# Altium PCB version2.PcbDoc
Units mm, origin at the board's own origin, x right, y up, seen from the top; angles counter-clockwise.
Board outline 80 x 30 mm, 4 copper layers (Top Layer, GNDPlane1, GNDPlane2, Bottom Layer), stack 1.587 mm thick; 38 components, 28 nets, 175 pads, 296 vias.
Unrouted connection lines stored in the file: 2.
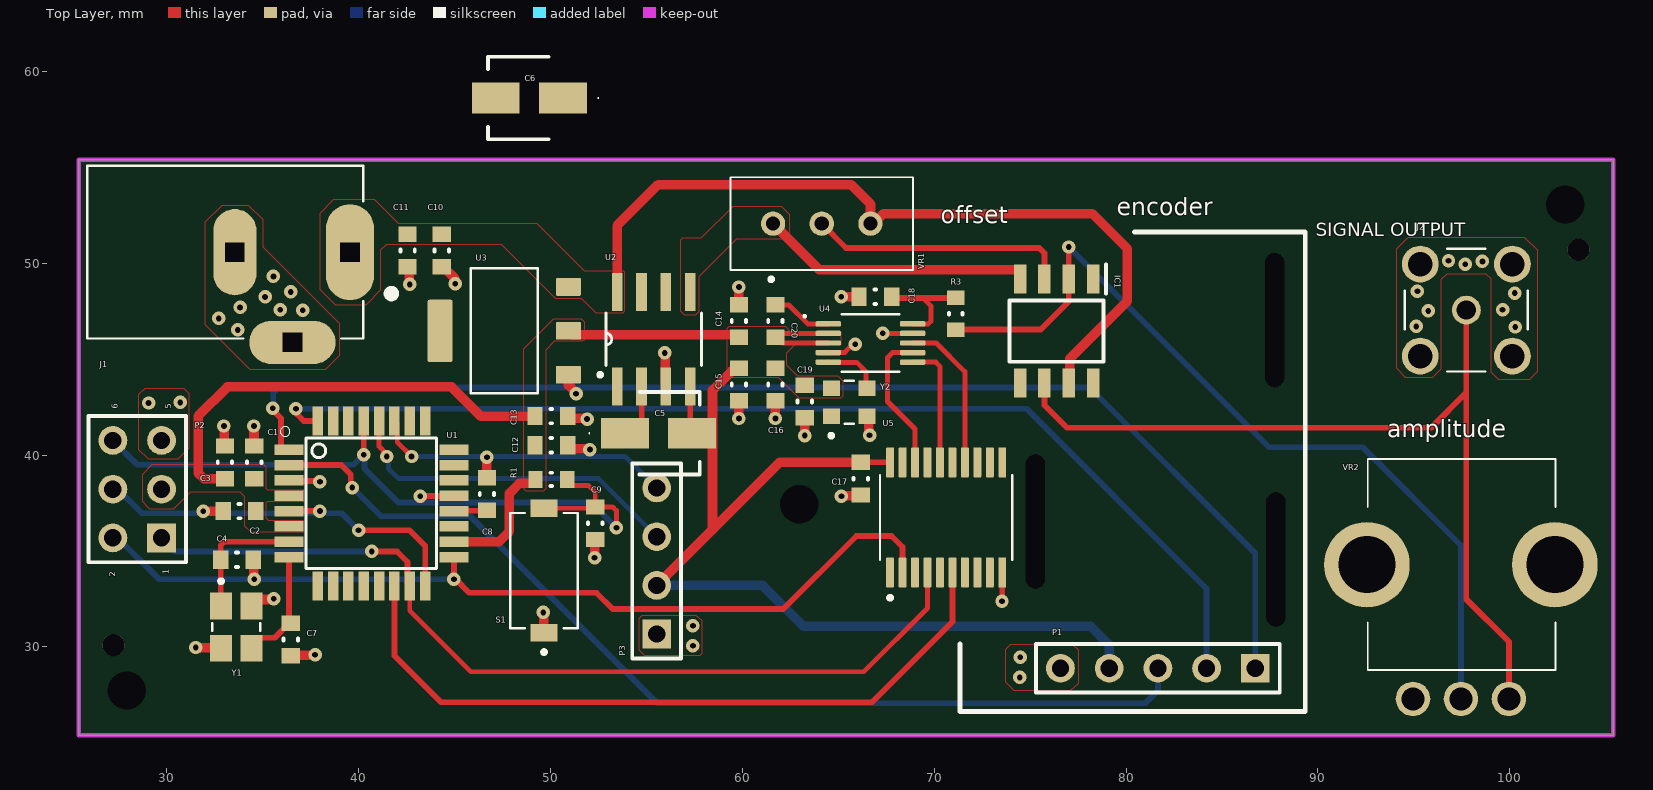
[diagram p0: Top Layer view]
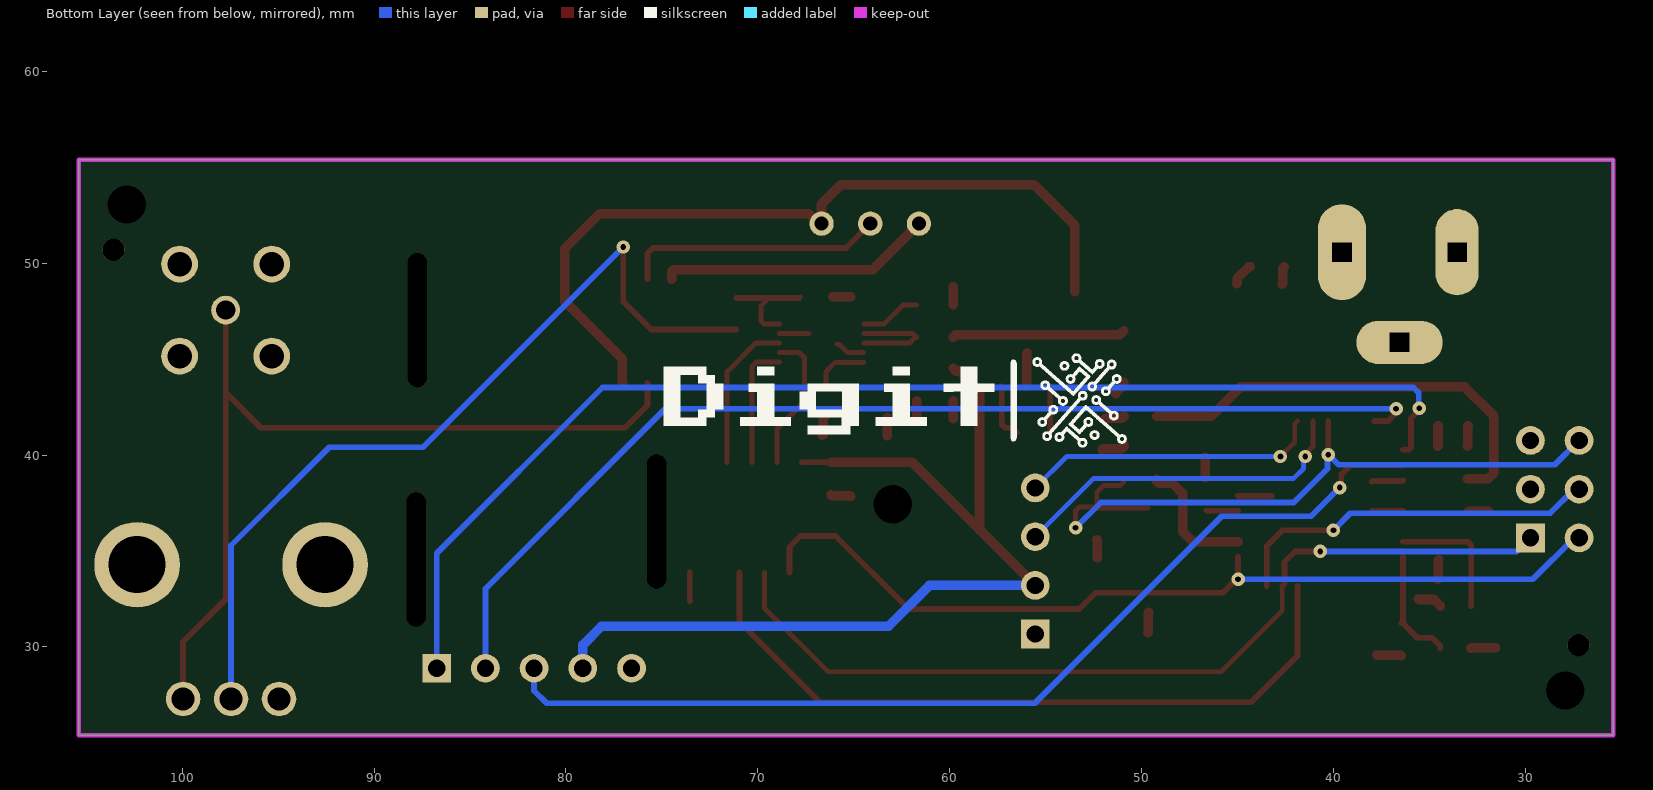
[diagram p1: Bottom Layer view, seen from below]
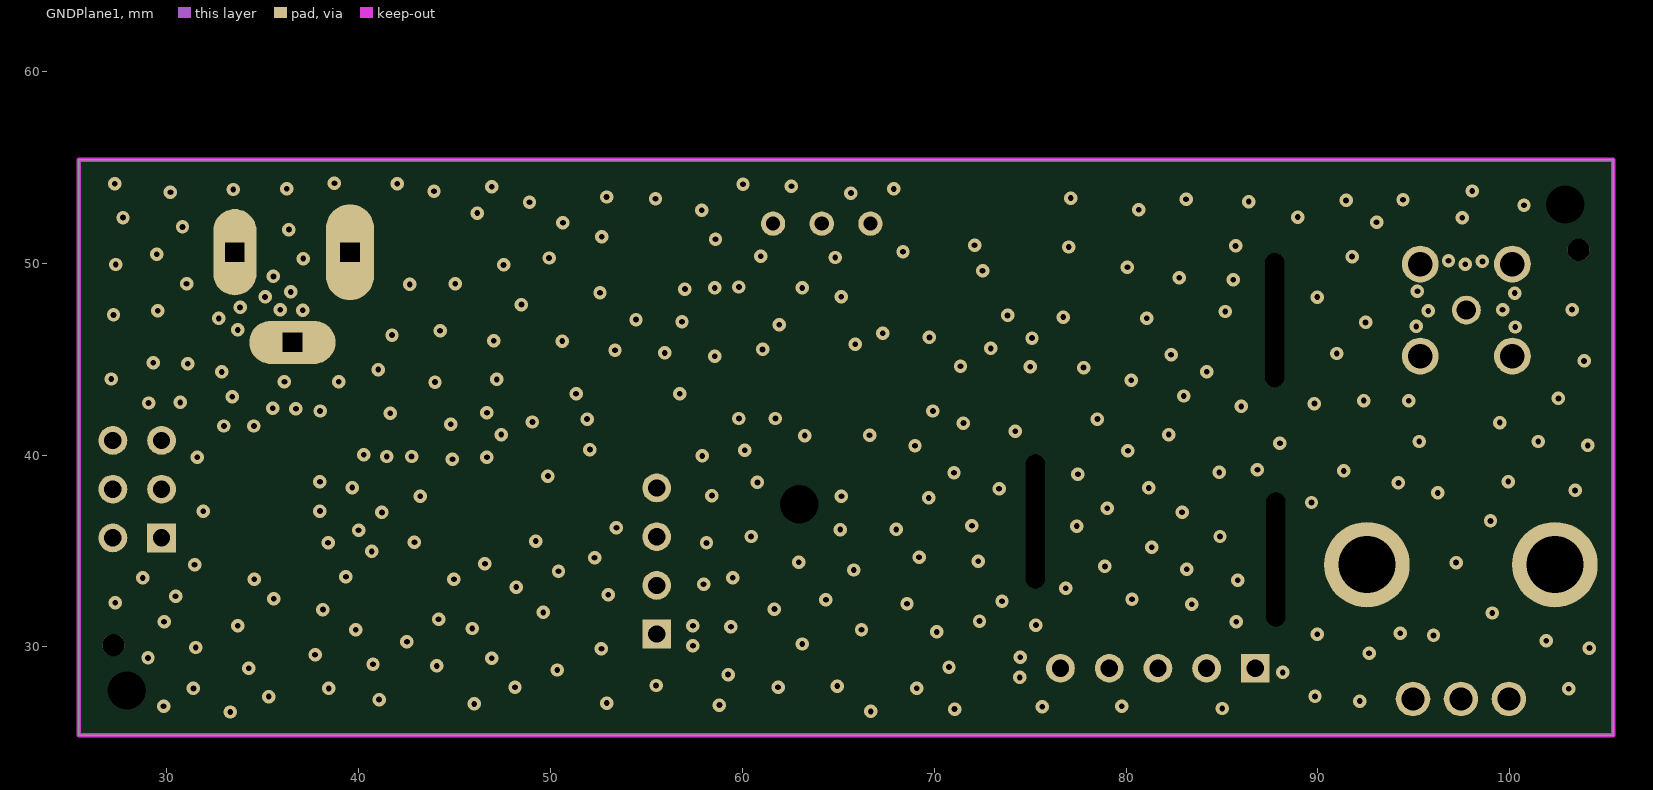
[diagram p2: GNDPlane1]
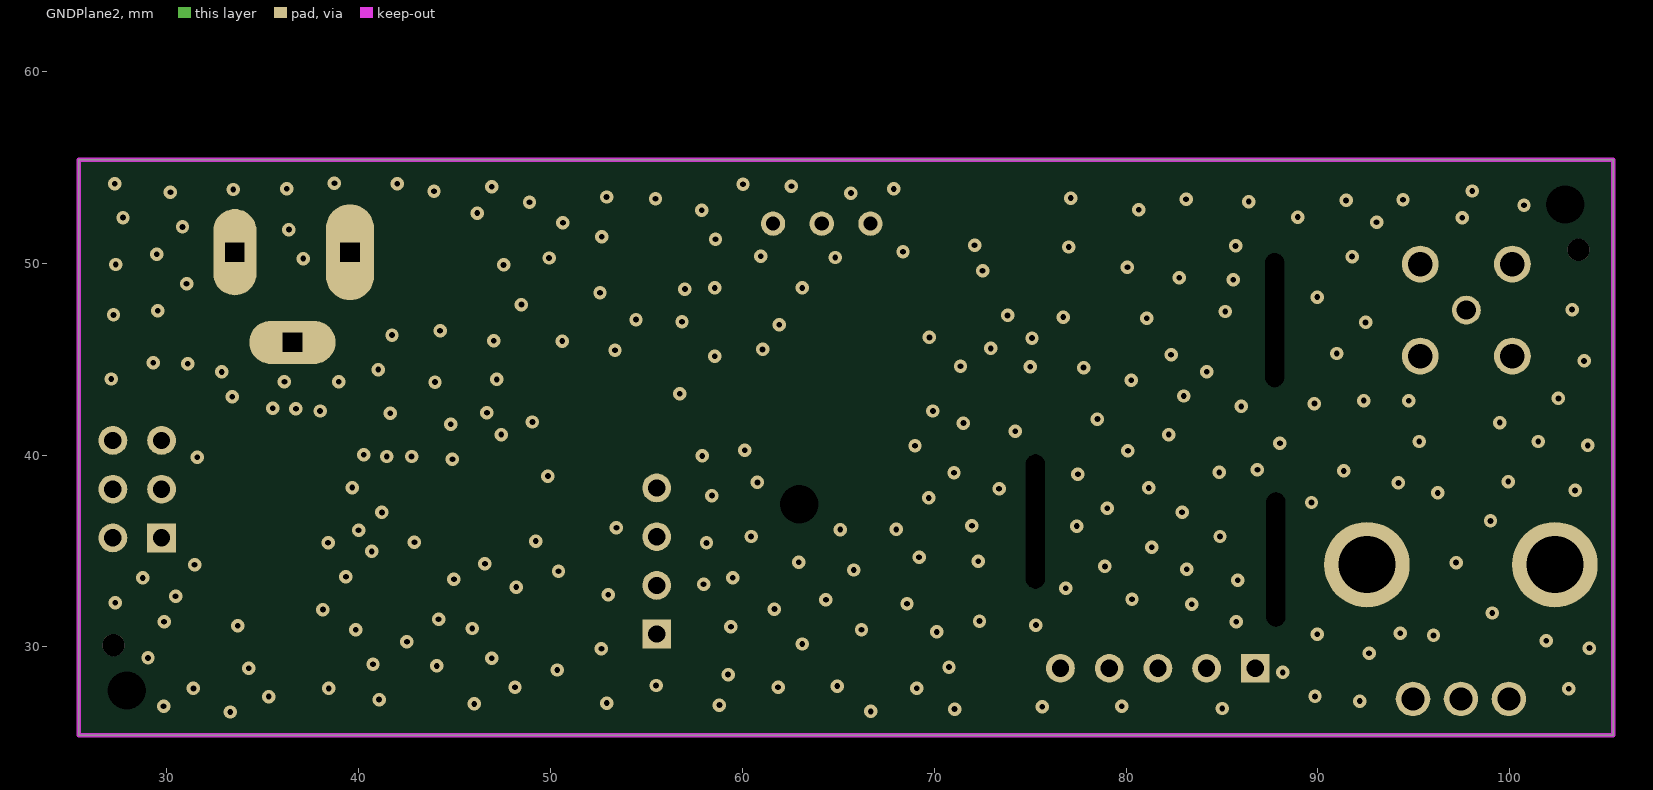
[diagram p3: GNDPlane2]
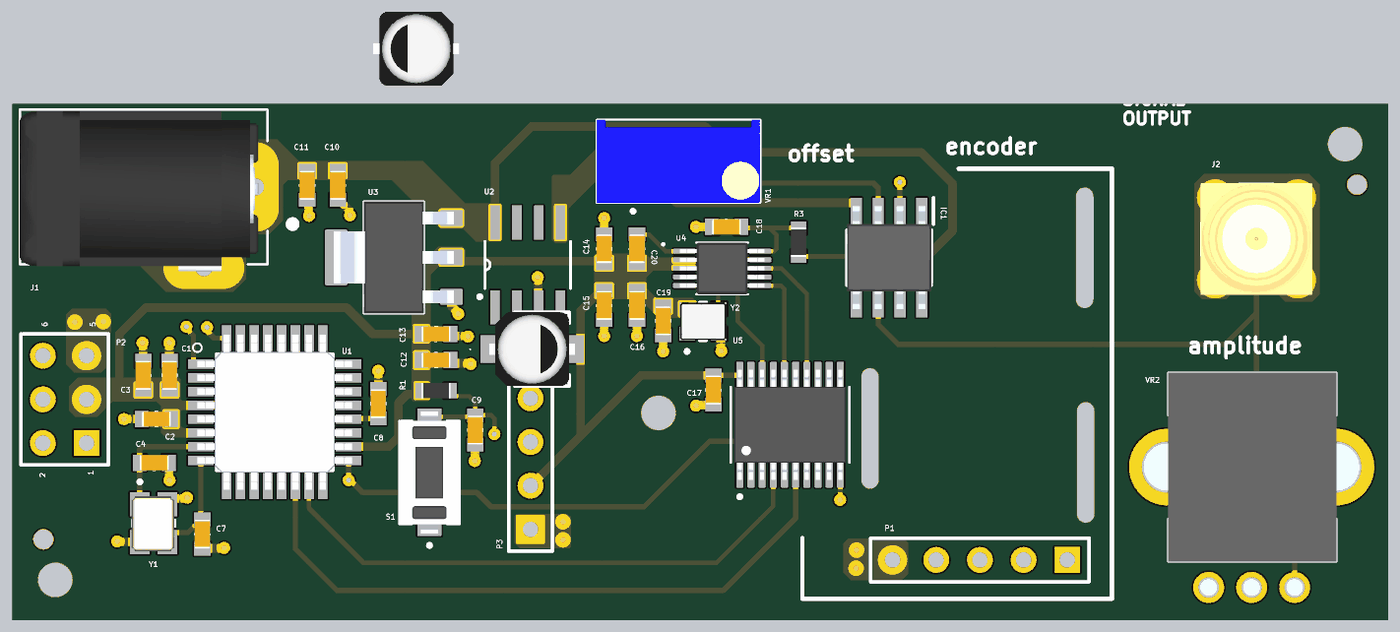
[diagram p4: 3D render of the assembled board from above, using the file's embedded part models]

## Layer stack, top to bottom
Top Solder: solder mask 0.0102, Solder Resist, Dk 4
Top Layer: signal copper 0.0356
Dielectric 2: prepreg 0.2104, PP-006, Dk 4.6
GNDPlane1: signal copper 0.0152
Dielectric 1: core 1.065, FR-4, Dk 4.6
GNDPlane2: signal copper 0.0152
Dielectric 3: prepreg 0.2104, PP-006, Dk 4.6
Bottom Layer: signal copper 0.0356
Bottom Solder: solder mask 0.0102, Solder Resist, Dk 4

## Board outline
25.4,25.4 105.4,25.4 105.4,55.4 25.4,55.4

## Design rules (kind name [scope] priority, off if disabled: settings)
Clearance [All] p1: gap=0.254 ignorepadtopadclearanceinfootprint=FALSE except(0: Arc-Hole Track-Hole SMDPad-Hole THPad-Hole Via-Hole Fill-Hole Poly-Hole Region-Hole Text-Hole; 0.127: Arc-Arc Arc-Track Arc-SMDPad Track-Track Track-SMDPad SMDPad-SMDPad)
PolygonConnect PolygonConnect_GND [(InNamedPolygon('GND_PowerPlane1') AND InNamedPolygon('GND_PowerPlane2'))] p1: connectstyle=Relief reliefconductorwidth=0.254 reliefentries=4 polygonreliefangle="90 Angle" airgapwidth=0.254
PolygonConnect [All] p2: connectstyle=Direct reliefconductorwidth=0.254 reliefentries=4 polygonreliefangle="90 Angle" airgapwidth=0.254
RoutingVias [All] p1: holewidth=0.711 width=1.27 viastyle="Through Hole" minholewidth=0.711 minwidth=1.27 maxholewidth=0.711 maxwidth=1.27
SolderMaskExpansion [All] p1: expansion=0.102 istentingtop=FALSE
Width [All] p1: maxlimit=0.5 minlimit=0.254 preferedwidth=0.3
30 further rules are at their usual default settings.

## Components (designator, comment, footprint, x,y, rotation, side; value= is the part's Value field where it differs from the comment)
C1 "100nF" CAP_0603 34.544,39.624 r270 top
C2 "100nF" CAP_0603 33.782,37.084 r0 top
C3 "10uF" CAP_0603 33.02,39.624 r270 top
C4 "50pF" CAP_0603 33.655,34.544 r180 top
C5 "10uF" EEE1AA220WR 55.626,41.148 r0 top
C6 "10uF" EEE1AA220WR 48.89,58.62 r180 top
C7 "50pF" CAP_0603 36.449,30.392 r90 top
C8 "100nF" CAP_0603 46.68,37.98 r270 top
C9 "100nF" CAP_0603 52.324,36.449 r90 top
C10 "10uF" CAP_0603 44.323,50.673 r90 top
C11 "100nF" CAP_0603 42.545,50.673 r90 top
C12 "10uF" CAP_0603 50.038,40.513 r180 top
C13 "100nF" CAP_0603 50.038,42.037 r180 top
C14 "100nF" CAP_0603 59.817,46.99 r270 top
C15 "10uF" CAP_0603 59.817,43.688 r90 top
C16 "100nF" CAP_0603 61.722,43.688 r90 top
C17 "100nF" CAP_0603 66.167,38.774 r90 top
C18 "100nF" CAP_0603 66.929,48.26 r0 top
C19 "100nF" CAP_0603 63.246,42.799 r90 top
C20 "10nF" CAP_0603 61.722,46.99 r270 top
IC1 "TL071CDR" SOIC127P600X175-8N 76.38,46.47 r270 top
J1 "PJ_002AH" DCJack_3pins 39.54,50.58 r0 top
J2 "SMA_Connector" SMA_Connector 97.74,47.562 r0 top
P1 "Header 5" HDR1X5 86.74,28.89 r180 top
P2 "Header 3X2" HDR2X3 29.718,35.687 r90 top
P3 "Header 4" HDR1X4 55.53,30.67 r90 top
R1 "10k" RES_0603 50.038,38.735 r180 top
R3 "2.2k" RES_0603 71.12,47.371 r90 top
S1 "Switch_SPST" SPST-NO_Switch 49.657,30.734 r90 top
U1 "Atmega328-AU" ATMEGA328-AU 36.358,40.284 r0 top
U2 "ICL7660AIBAZA-T" ICL7660AIBAZA-T 53.467,43.586 r90 top
U3 "AMS1117-3.3" SOT229P700X180-4N 50.927,44.192 r180 top
U4 "AD9833BRMZ-REEL7" AD9833BRMZ-REEL7 66.675,45.847 r0 top
U5 "3-Wire Buffer Driver" SOP65P640X120-20N 67.698,33.884 r90 top
VR1 "3296W-1-103" 3296W1103 61.595,52.07 r90 top
VR2 "RK09K1130ACL" RK09K1130ACL 97.46,27.29 r0 top
Y1 "Crystal Oscillator" 4pinOscillator 32.817,32.131 r270 top
Y2 "S3D25.000000A20F30T" OSC_ECS-327TXO-30-TR 64.643,42.037 r0 top

## Footprints (in the part's own frame and the unit in brackets; to place one, negate y for a bottom-side part, rotate by r counter-clockwise, add the part's x,y. Pads: shape width x height; smd on the part's side, far side on the other; paste and mask are expansions set on the pad)
4pinOscillator [mm] "SMD3225-4P"
  rect 1.4x1.15 smd: 1(0,0) 2(2.2,0) 3(2.2,1.6) 4(0,1.6)
  silkscreen extent -1.4,-0.45 1.3,2.05, body extent -0.46,-0.49 2.74,2.01, height 0.6
3296W1103 [mm]
  round 1.269 hole 0.74: 1(0,0) 2(0,-2.54) 3(0,-5.08)
  silkscreen extent -3,-7.3 2.42,2.22, body extent -2.42,-7.29 2.42,2.21, height 11.44
AD9833BRMZ-REEL7 [mm] "10-MSOP"
  rrect50% 1.32x0.28 smd: 1(-2.2,1) 2(-2.2,0.5) 3(-2.2,0) 4(-2.2,-0.5) 5(-2.2,-1) 6(2.2,-1) 7(2.2,-0.5) 8(2.2,0) 9(2.2,0.5) 10(2.2,1)
  silkscreen extent -3.48,-1.5 1.5,1.5, body extent -2.45,-1.5 2.45,1.5, height 1.07
ATMEGA328-AU [mm] "TQFP-32(7x7)"
  rect 1.5x0.55 smd: 1(0,0) 2(0,-0.8) 3(0,-1.6) 4(0,-2.4) 5(0,-3.2) 6(0,-4) 7(0,-4.8) 8(0,-5.6) 17(8.6,-5.6) 18(8.6,-4.8) 19(8.6,-4) 20(8.6,-3.2) 21(8.6,-2.4) 22(8.6,-1.6) 23(8.6,-0.8) 24(8.6,0)
  rect 0.55x1.5 smd: 9(1.5,-7.1) 10(2.3,-7.1) 11(3.1,-7.1) 12(3.9,-7.1) 13(4.7,-7.1) 14(5.5,-7.1) 15(6.3,-7.1) 16(7.1,-7.1) 25(7.1,1.5) 26(6.3,1.5) 27(5.5,1.5) 28(4.7,1.5) 29(3.9,1.5) 30(3.1,1.5) 31(2.3,1.5) 32(1.5,1.5)
  silkscreen extent -0.45,-6.2 7.7,1.2, body extent -0.2,-7.3 8.8,1.7, height 1.18
CAP_0603 [mm] "Chip Capacitor, 2-Leads, Body 1,60x0,80mm, IPC Medium Density, 0603"
  rect 0.8x0.95 smd: 1(-0.85,0) 2(0.85,0)
  silkscreen extent -0.05,-0.38 0.05,0.38, body extent -0.85,-0.45 0.85,0.45, height 0.6
DCJack_3pins [mm]
  oval 2.5x5 hole 1 square: 1(0,0)
  oval 2.25x4.5 hole 1 square: 2(-6,0)
  oval 4.5x2.25 hole 1 square: 3(-3,-4.7)
  silkscreen extent -13.7,-4.5 2.36,4.5, body extent -13.72,-4.9 0.18,4.4, height 11
EEE1AA220WR [mm]
  rect 2.5x1.6 smd: 1(-1.75,0) 2(1.75,0)
  silkscreen extent -3.63,-2.15 2.15,2.15, body extent -2.5,-2.15 2.5,2.15, height 5.78
HDR1X4 [mm] "Connector; Header; 4 Position"
  rect 1.5x1.5 hole 0.9: 1(0,0)
  round 1.5 hole 0.9: 2(2.54,0) 3(5.08,0) 4(7.62,0)
  silkscreen extent -1.27,-1.27 8.89,1.27
HDR1X5 [mm] "Connector; Header; 5 Position"
  rect 1.5x1.5 hole 0.9: 1(0,0)
  round 1.5 hole 0.9: 2(2.54,0) 3(5.08,0) 4(7.62,0) 5(10.16,0)
  silkscreen extent -1.27,-1.27 11.43,1.27
HDR2X3 [mm] "Connector; Header; 3x2 Position"
  rect 1.5x1.5 hole 0.9: 1(0,0)
  round 1.5 hole 0.9: 2(0,2.54) 3(2.54,0) 4(2.54,2.54) 5(5.08,0) 6(5.08,2.54)
  silkscreen extent -1.27,-1.27 6.35,3.81
ICL7660AIBAZA-T [mil] "SOIC-8"
  rect 78x22 smd: 1(0,0) 2(0,-50) 3(0,-100) 4(0,-150) 5(194,-150) 6(194,-100) 7(194,-50) 8(194,0)
  silkscreen extent 43,-173 151,23
OSC_ECS-327TXO-30-TR [mm] "25MHz - 2.5*2.0mm -  SMD3225-4P"
  rect 0.9x0.8 smd: 1(0,0) 2(1.85,0) 3(1.85,1.45) 4(0,1.45)
  silkscreen extent -0.11,-1.12 1.15,1.85, body extent -0.43,-0.39 2.28,1.85, height 1.2
RES_0603 [mm] "Chip Resistor, 2-Leads, Body 1,60x0,80mm, IPC Medium Density, 0603"
  rect 0.75x0.9 smd: 1(-0.825,0) 2(0.825,0)
  silkscreen extent -0.05,-0.35 0.05,0.35, body extent -0.85,-0.45 0.85,0.45, height 0.6
RK09K1130ACL [mm]
  round 1.8 hole 1.2: 1(-2.5,0) 2(0,0) 3(2.5,0)
  round 4.46 hole 2.973: MH1(-4.9,7) MH2(4.9,7)
  silkscreen extent -4.86,1.5 4.94,12.5, body extent -6.28,-0.5 6.29,12.5, height 15.1
SMA_Connector [mm]
  round 1.508 hole 1: 1(0,0)
  round 1.92 hole 1.28: G1(-2.4,2.4) G2(-2.4,-2.4) G3(2.4,-2.4) G4(2.4,2.4)
  silkscreen extent -3.2,-3.2 3.2,3.2, body extent -3.25,-3.25 3.25,3.25, height 13.6
SOIC127P600X175-8N [mm]
  rect 1.525x0.65 smd: 1(-2.712,1.905) 2(-2.712,0.635) 3(-2.712,-0.635) 4(-2.712,-1.905) 5(2.712,-1.905) 6(2.712,-0.635) 7(2.712,0.635) 8(2.712,1.905)
  silkscreen extent -3.47,-2.45 1.6,2.58, body extent -3,-2.45 3,2.45, height 1.75
SOP65P640X120-20N [mm] "3-Wire buffer driver"
  rrect25% 1.57x0.41 smd: 1(0,0) 2(0,-0.65) 3(0,-1.3) 4(0,-1.95) 5(0,-2.6) 6(0,-3.25) 7(0,-3.9) 8(0,-4.55) 9(0,-5.2) 10(0,-5.85) 11(5.74,-5.85) 12(5.74,-5.2) 13(5.74,-4.55) 14(5.74,-3.9) 15(5.74,-3.25) 16(5.74,-2.6) 17(5.74,-1.95) 18(5.74,-1.3) 19(5.74,-0.65) 20(5.74,0)
  silkscreen extent -1.42,-6.38 5.07,0.53, body extent -0.33,-6.18 6.07,0.33, height 1.2
SOT229P700X180-4N [mm] "AMS1117-3.3"
  rrect15% 1.31x0.93 smd: 1(0,0) 2(0,-2.29) 3(0,-4.58)
  rrect15% 1.31x3.24 smd: 4(6.69,-2.29)
  silkscreen extent -1.76,-5.54 5.1,0.96, body extent -0.15,-5.54 6.84,0.96, height 1.8
SPST-NO_Switch [mm]
  rect 0.9x1.4 smd: 1(0,0) 2(6.5,0)
  silkscreen extent -1.1,-1.75 6.25,1.75, body extent -0.32,-1.75 6.78,1.75, height 4.3

## Part data
C1 C2 C3 C4 C7 C8 C9 C10 C11 C12 C13 C14 C15 C16 C17 C18 C19 C20: library part Cap_0603, "Capacitor SMD 0603 Generic"
C5 C6: library part EEE-1CA100SR, "Capacitor Polarised", Manufacturer_Name=Panasonic, Mouser Part Number=667-EEE-1CA100SR, Arrow Part Number=EEE-1CA100SR, Arrow Price/Stock=https://www.arrow.com/en/products/eee-1ca100sr/panasonic?region=europe, Datasheet Link=http://industrial.panasonic.com/cdbs/www-data/pdf/RDE0000/ABA0000C1145.pdf, Height=5.5mm, Manufacturer_Part_Number=EEE-1CA100SR, Mouser Price/Stock=https://www.mouser.co.uk/ProductDetail/Panasonic/EEE-1CA100SR?qs=ANJC8C65Mw5HUsKv8znGCA%3D%3D
IC1: "Integrated Circuit", Manufacturer_Name="Texas Instruments", Mouser Part Number=595-TL071CDR, Arrow Part Number=TL071CDR, Arrow Price/Stock=https://www.arrow.com/en/products/tl071cdr/texas-instruments?region=nac, Datasheet Link=http://www.ti.com/lit/gpn/tl071, Height=1.75mm, Manufacturer_Part_Number=TL071CDR, Mouser Price/Stock=https://www.mouser.co.uk/ProductDetail/Texas-Instruments/TL071CDR?qs=odmYgEirbwyeR17frtRMJg%3D%3D
J1: library part DCJack_3pins
J2: "RF Coaxial Straight SMA Connector"
P1: "Header, 5-Pin", LatestRevisionDate=17-Jul-2002, LatestRevisionNote="Re-released for DXP Platform.", Publisher="Altium Limited"
P2: "Header, 3-Pin, Dual row", LatestRevisionDate=17-Jul-2002, LatestRevisionNote="Re-released for DXP Platform.", Publisher="Altium Limited"
P3: "Header, 4-Pin", LatestRevisionDate=17-Jul-2002, LatestRevisionNote="Re-released for DXP Platform.", Publisher="Altium Limited"
R1 R3: library part Res_0603, "Resistor SMD 0603 Generic"
S1: "Switch_SPST 2 pins"
U1: "AVR AVR® ATmega Microcontroller IC 8-Bit 20MHz 32KB (16K x 16) FLASH 32-TQFP (7x7)"
U2: library part ICL7660A, "Charge Pump Switching Regulator IC Positive or Negative Fixed -Vin, 2Vin 1 Output 45mA 8-SOIC (0.154\", 3.90mm Width)"
U3: "Sot223/Pkg 1-Amp 3.3-Volt Low Drop Out Voltage Regulatator"
U4: "Direct Digital Synthesis IC 10 b 25 MHz 28 b Tuning 10-MSOP"
U5: library part SN74HCT244PWR, "Octal Buffers And Line Drivers With 3-State Outputs 20-TSSOP -40 to 85"
VR1: "Variable Resistor", Manufacturer_Name="Chengdu Guosheng Tech", Datasheet Link=https://datasheet.lcsc.com/szlcsc/1811271436_Chengdu-Guosheng-Tech-3296W-1-103_C330432.pdf, Height=10.28mm, Manufacturer_Part_Number=3296W-1-103
VR2: "Variable Resistor", Manufacturer_Name="ALPS Electric", Mouser Part Number=688-RK09K1130ACL, Arrow Part Number=RK09K1130ACL, Arrow Price/Stock=https://www.arrow.com/en/products/rk09k1130acl/alps-electric, Datasheet Link=https://www.alps.com/prod/info/E/HTML/Potentiometer/RotaryPotentiometers/RK09K/RK09K1130ACL.html, Height=15mm, Manufacturer_Part_Number=RK09K1130ACL, Mouser Price/Stock=https://www.mouser.co.uk/ProductDetail/Alps-Alpine/RK09K1130ACL?qs=6EGMNY9ZYDQzEvxfrSIq9A%3D%3D
Y1: library part 4pinOscillator
Y2: library part ECS-327TXO-30-TR, "Oscillator TCXO 0.032768MHz Â±1.5ppm (Tol) Â±5ppm (Stability) 15pF CMOS 60% 3V 4-Pin CSMD T/R"

## Free pads (board coordinates)
  round 0 hole 1 slot 7 at 90 deg: 2(75.27,36.54) 2(87.75,47.04) 2(87.81,34.56)
  round 0 hole 2: 3(62.97,37.44) MH(27.9,27.73) MH(102.9,53.07)
  round 1.152 hole 1.152: TH(27.21,30.09) TH(103.59,50.71)

## Via types
v1: diameter 0.7, hole 0.3, GNDPlane1 to GNDPlane2, 233 vias
v2: diameter 0.7, hole 0.3, Top Layer to GNDPlane1, 52 vias
v3: diameter 0.7, hole 0.3, Top Layer to Bottom Layer, 11 vias

## Nets (pads, with @x,y where several pads share a name; then routed paths per layer and width w, separated by ;. In a path a pad name is that pad's centre, name@x,y a point inside that pad or via, vN(x,y) a via of type N, cw(c..) or ccw(c..) an arc to the next point about the centre after c; other vN are vias at no path point)
5V: C1.2 C2.2 C3.2 C12.2 C13.2 C14.2 C15.2 C16.2 C17.2 C19.2 C20.2 P1.4 P2.3 P3.2 R1.2 U1.4 U1.6 U1.18 U3.2 U4.2 U4.3 U5.20 Y2.4 | length 94.9
  Top Layer w0.254: U4.3 62.09,45.847 61.797,46.14 C20.2 61.929,46.347 U4.2
  Top Layer w0.3: C17.2 U5.20
  Top Layer w0.5: C3.2 31.916,38.774 31.623,39.067 31.623,42.037 33.147,43.561 44.831,43.561 46.355,42.037 C13.2 ; U1.18 47.304,35.484 47.85,36.03 47.85,38.01 48.375,38.535 49.088,38.535 49.213,38.66 R1.2 ; U3.2 51.142,46.267 59.69,46.267 C14.2 ; P3.2 58.44,36.12 ; C15.2 59.667,44.388 59.448,44.388 58.44,43.38 58.44,36.12 ; C17.2 61.944,39.624 58.44,36.12
  Bottom Layer w0.5: P3.2 61.05,33.21 63.18,31.08 78.15,31.08 79.12,30.11 P1.4
+12V: C10.2 C11.2 IC1.7 J1.1 U2.8 U3.3 VR1.3 | length 41.6
  Top Layer w0.5: U2.8 53.467,51.967 55.602,54.102 65.659,54.102 66.675,53.086 VR1.3 66.832,52.07 67.352,52.59 78.24,52.59 80.07,50.76 80.07,48.03 77.07,45.03 77.07,43.813 IC1.7
-12V: C6.1 IC1.4 U2.5 VR1.1 | length 14.3
  Top Layer w0.5: VR1.1 64.008,49.657 74.4,49.657 74.475,49.582 IC1.4
AREF: C8.2 U1.20 | length 1.7
  Top Layer w0.3: U1.20 44.978,37.104 46.59,37.104 C8.2@46.609,37.123
CAP+: C5.1 U2.2 | length 2.4
  Top Layer w0.3: U2.2 54.756,43.567 C5.1@54.756,41.167
CAP-: C5.2 U2.4 | length 3
  Top Layer w0.3: C5.2@56.476,41.184 56.726,41.434 57.101,41.434 57.277,41.61 U2.4
COMP: C20.1 U4.1 | length 3.2
  Top Layer w0.254: C20.1 61.741,47.821 62.429,47.821 63.403,46.847 U4.1
FSYNC: U4.8 U5.14 | length 8.1
  Top Layer w0.254: U4.8 70.104,45.847 71.598,44.353 U5.14
GND: C1.1 C2.1 C3.1 C4.1 C6.2 C7.1 C8.1 C9.1 C10.1 C11.1 C12.1 C13.1 C14.1 C15.1 C16.1 C17.1 C18.1 C19.1 J1.2 J1.3 J2.G1 J2.G2 J2.G3 J2.G4 P1.5 P2.5 P3.1 pad.2 pad.3 S1.1 U1.3 U1.5 U1.21 U2.3 U3.1 U4.4 U4.9 U5.10 Y1.2 Y1.4 Y2.2 | length 34.7
  Top Layer w0.254: U4.4 64.488,45.36 65.339,45.36 65.759,45.78 v2(65.88,45.78) ; v2(67.314,46.351) 68.871,46.351 U4.9
  Top Layer w0.3: U1.5 v2(37.973,37.084) ; U1.3 36.396,38.646 37.935,38.646 v2(37.973,38.608) ; v2(43.2,37.86) 43.212,37.872 44.946,37.872 U1.21 ; v2(73.533,32.385) 73.541,32.393 73.541,33.877 U5.10
  Top Layer w0.5: v2@31.517,29.951 32.796,29.951 Y1.2 ; v2(31.89,37.08) 31.892,37.082 32.93,37.082 C2.1 ; v2(32.97,41.52) 32.995,41.495 32.995,40.499 C3.1 ; Y1.4 34.417,32.149 34.742,32.474 35.522,32.474 v2(35.56,32.512) ; C4.1 34.525,34.525 34.525,33.547 v2(34.544,33.528) ; v2(34.53,41.52) 34.537,41.513 34.537,40.481 C1.1 ; C7.1 36.474,29.567 37.695,29.567 v2(37.719,29.591) ; C11.1 42.622,49.746 42.622,48.938 v2(42.66,48.9) ; C10.1 44.398,49.823 44.992,49.229 44.992,48.968 v2(45.03,48.93) ; C8.1 v2(46.68,39.885) ; v2(49.62,31.8) 49.639,31.781 49.639,30.752 S1.1 ; C12.1 50.888,40.478 51.038,40.328 52.012,40.328 v2(52.05,40.29) ; C13.1 51.007,41.918 51.862,41.918 v2(51.9,41.88) ; U3.1@50.927,43.807 50.927,43.657 51.33,43.254 v2(51.33,43.2) ; v2(52.29,34.65) 52.307,34.667 52.307,35.582 C9.1 ; v2(55.95,45.33) 55.979,45.301 55.979,43.615 U2.3 ; v2(59.817,41.91) C15.1 ; C14.1 v2(59.817,48.768) ; v2(61.722,41.91) C16.1 ; v2(63.246,41.021) C19.1 ; v2(65.151,48.26) C18.1 ; v2(65.16,37.86) 65.192,37.892 66.135,37.892 C17.1 ; Y2.2 66.592,41.938 66.592,41.078 v2(66.63,41.04)
  other v1: 33.3,26.61 66.69,26.64 71.062,26.761 85.02,26.79 75.63,26.88 29.82,26.91 79.77,26.91 58.8,26.97 46.02,27.03 52.93,27.076 92.19,27.18 41.056,27.256 35.304,27.414 89.85,27.42 103.082,27.823 31.38,27.84 38.43,27.84 69.086,27.85 61.86,27.9 48.145,27.904 64.95,27.96 55.5,27.99 59.25,28.56 88.171,28.672 50.34,28.8 34.26,28.89 70.77,28.95 44.07,29.01 40.74,29.1 46.931,29.417 29.01,29.43 92.67,29.67 52.65,29.91 104.16,29.94 63.113,30.153 42.51,30.27 101.91,30.33 96.03,30.6 89.97,30.66 94.29,30.72 70.13,30.782 39.84,30.9 66.21,30.9 45.914,30.962 59.4,31.05 33.69,31.11 75.3,31.14 29.85,31.32 85.74,31.32 72.36,31.35 44.16,31.44 99.09,31.77 38.13,31.95 61.666,31.973 83.425,32.22 68.58,32.25 27.3,32.31 64.355,32.455 80.31,32.49 30.45,32.64 52.999,32.722 76.86,33.06 48.21,33.12 57.976,33.263 85.818,33.484 28.74,33.6 59.497,33.607 39.33,33.66 50.412,33.949 65.806,34.013 83.16,34.05 78.9,34.2 31.44,34.29 46.576,34.343 97.205,34.397 62.933,34.416 72.3,34.47 69.21,34.68 81.335,35.203 38.4,35.43 58.126,35.423 42.9,35.46 49.23,35.52 60.45,35.76 84.9,35.76 65.1,36.12 68.017,36.126 77.43,36.3 71.965,36.323 99,36.57 41.206,37.013 82.92,37.02 79.02,37.23 89.67,37.53 69.72,37.77 58.41,37.89 96.247,38.033 103.41,38.16 73.38,38.25 81.183,38.294 94.2,38.55 60.78,38.58 99.926,38.62 49.86,38.91 77.49,39 71.029,39.076 84.862,39.099 91.35,39.18 86.85,39.24 44.88,39.78 31.576,39.893 57.9,39.96 80.1,40.23 60.12,40.26 68.998,40.495 104.075,40.507 88.02,40.62 95.28,40.71 101.49,40.71 47.43,41.07 82.23,41.07 74.22,41.25 44.79,41.61 71.52,41.67 99.48,41.7 49.05,41.73 78.51,41.88 41.64,42.18 46.68,42.21 37.98,42.3 69.93,42.3 86.01,42.54 89.82,42.69 92.394,42.844 94.74,42.84 102.54,42.96 33.406,43.043 83.011,43.083 56.73,43.2 38.956,43.823 43.971,43.808 36.12,43.83 80.268,43.91 47.19,43.95 27.095,43.97 32.85,44.34 84.209,44.346 41.01,44.46 77.787,44.563 75,44.61 71.37,44.64 31.08,44.76 29.28,44.82 103.882,44.911 58.56,45.15 82.35,45.24 90.99,45.3 53.356,45.473 61.05,45.51 72.946,45.563 47.04,45.96 50.609,45.949 75.097,46.105 69.75,46.14 41.73,46.26 44.237,46.482 61.92,46.8 92.49,46.92 56.85,46.95 54.45,47.07 81.074,47.132 76.72,47.197 73.825,47.285 27.21,47.31 85.17,47.49 29.515,47.526 103.257,47.589 48.48,47.85 89.97,48.24 52.576,48.473 57,48.66 58.56,48.72 63.12,48.72 31.02,48.93 85.59,49.14 82.772,49.244 72.519,49.614 80.07,49.8 47.55,49.92 27.324,49.938 37.11,50.25 49.92,50.28 64.835,50.304 91.784,50.354 60.96,50.37 29.469,50.471 68.37,50.61 85.71,50.91 72.105,50.942 58.597,51.256 52.666,51.383 36.356,51.758 30.81,51.9 50.64,52.11 93.06,52.14 27.706,52.384 97.53,52.38 88.95,52.41 46.17,52.62 57.878,52.767 80.66,52.792 100.746,53.03 48.9,53.19 86.4,53.22 91.47,53.28 94.44,53.31 83.13,53.34 55.47,53.37 77.112,53.402 52.92,53.46 65.656,53.663 30.18,53.7 43.92,53.76 98.054,53.772 33.45,53.85 67.885,53.882 36.24,53.892 46.936,53.993 62.556,54.014 60.03,54.12 27.27,54.15 42,54.15 38.73,54.18
  other v2: 74.46,28.41 74.49,29.46 31.496,29.972 57.42,30.06 57.42,31.11 29.04,42.72 30.69,42.75 33.69,46.53 100.29,46.68 95.13,46.71 32.7,47.13 95.76,47.52 37.08,47.55 35.91,47.58 99.63,47.58 33.81,47.7 35.113,48.25 100.26,48.45 36.45,48.51 95.19,48.54 35.55,49.32 97.683,49.95 98.58,50.1 96.81,50.13
I2C_SCL: P3.4 U1.27 | length 15.7
  Top Layer w0.254: U1.27 42.006,41.636 42.006,40.674 v3(42.75,39.93)
  Bottom Layer w0.254: v3(42.75,39.93) 53.89,39.93 P3.4
I2C_SDA: P3.3 U1.28 | length 18.1
  Top Layer w0.254: U1.28 41.058,40.453 41.46,40.051 v3(41.46,39.93)
  Bottom Layer w0.254: v3(41.46,39.93) 41.545,39.845 41.545,39.305 42.06,38.79 52.49,38.79 P3.3
IN+: IC1.3 VR1.2 | length 13.6
  Top Layer w0.3: VR1.2 65.405,50.8 75.47,50.8 75.745,50.525 IC1.3
IN-: IC1.2 R3.1 VR2.2 | length 44.2
  Top Layer w0.3: R3.1 75.556,46.546 77.015,48.005 IC1.2 77.013,49.185 77.013,50.848 v3(77.01,50.85)
  Bottom Layer w0.3: v3(77.01,50.85) 87.45,40.41 92.34,40.41 97.46,35.29 VR2.2
MCLK: U4.5 Y2.3 | length 3.1
  Top Layer w0.254: U4.5 64.488,44.834 65.956,44.834 66.443,44.347 66.443,43.537 Y2.3
OSC1: C4.2 U1.7 Y1.1 | length 6.8
  Top Layer w0.3: Y1.1 32.805,32.143 32.805,35.308 32.981,35.484 U1.7
OSC2: C7.2 U1.8 Y1.3 | length 6.1
  Top Layer w0.3: Y1.3 34.417,30.056 34.842,30.481 35.613,30.481 36.374,31.242 C7.2 36.358,31.333 U1.8
OutputAD9833: C18.2 R3.2 U4.10 | length 5.8
  Top Layer w0.254: C18.2 C18.2@67.843,48.196 ; U4.10 69.685,46.847 69.834,46.996 69.834,47.768 69.406,48.196
  Top Layer w0.3: C18.2@67.843,48.196 69.406,48.196 R3.2
RESET: C9.2 P2.6 R1.1 S1.2 U1.29 | length 38.1
  Top Layer w0.254: S1.2 52.259,37.234 C9.2 ; R1.1 50.928,38.67 50.928,38.595 51.111,38.412 51.978,38.412 52.324,38.066 C9.2 ; v3(53.43,36.21) 53.43,37.11 53.241,37.299 C9.2
  Top Layer w0.3: v3@40.258,40.026 U1.29
  Bottom Layer w0.3: P2.6 28.448,39.497 39.728,39.497 v3(40.258,40.026) 40.296,39.987 40.296,39.294 42.06,37.53 52.11,37.53 v3(53.43,36.21)
ROT_CLK: P1.1 U1.1 | length 64.4
  Top Layer w0.3: v3(35.52,42.45) 35.52,42.342 35.94,41.922 35.94,40.409 36.065,40.284 U1.1
  Bottom Layer w0.3: v3(35.52,42.45) 35.54,42.47 35.54,43.25 35.82,43.53 78.09,43.53 86.74,34.88 P1.1
ROT_DT: P1.2 U1.32 | length 57
  Top Layer w0.3: v3(36.72,42.42) 36.797,42.343 36.797,42.12 37.133,41.784 U1.32
  Bottom Layer w0.3: v3(36.72,42.42) 74.82,42.42 84.2,33.04 P1.2
ROT_SW: P1.3 U1.2 | length 52.2
  Top Layer w0.3: U1.2 39.086,39.484 39.583,38.987 39.583,38.387 v3(39.66,38.31)
  Bottom Layer w0.3: v3(39.66,38.31) 41.16,36.81 45.81,36.81 55.56,27.06 81,27.06 81.66,27.72 P1.3
SCLK: U4.7 U5.18 | length 7.5
  Top Layer w0.254: U4.7 67.826,45.347 67.564,45.085 67.564,42.799 68.998,41.365 U5.18
SDATA: U4.6 U5.16 | length 6.5
  Top Layer w0.254: U4.6 70.088,44.847 70.298,44.637 U5.16
Signal: IC1.6 J2.1 VR2.3 | length 45.6
  Top Layer w0.3: IC1.6 75.745,42.605 76.92,41.43 95.91,41.43 97.74,43.26 ; J2.1 97.74,43.26 ; VR2.3 99.96,30.27 97.74,32.49 97.74,43.26
SPI_FSYNC: U1.14 U5.6 | length 38
  Top Layer w0.3: U1.14 41.858,29.542 44.28,27.12 66.75,27.12 70.948,31.318 70.948,32.467 U5.6
SPI_MISO: P2.4 U1.16 | length 19.3
  Top Layer w0.3: v3(39.99,36.09) 42.65,36.09 43.458,35.282 U1.16
  Bottom Layer w0.3: P2.4@27.432,38.227 28.69,36.969 39.111,36.969 v3(39.99,36.09)
SPI_SCK: P2.2 U1.17 U5.2 | length 46.8
  Top Layer w0.3: U1.17 U1.17 v3(44.958,33.528) v3(44.958,33.528) 45.054,33.528 45.762,32.82 52.399,32.82 53.239,31.98 62.13,31.98 65.94,35.79 67.77,35.79 68.348,35.212 U5.2 ; U5.2@68.347,33.883 U5.2
  Bottom Layer w0.3: P2.2@27.432,35.687 29.591,33.528 v3(44.958,33.528)
SPI_SDATA: P2.1 U1.15 U5.4 | length 47.5
  Top Layer w0.254: U1.15 42.658,31.892 45.84,28.71 66.33,28.71 69.648,32.028 U5.4
  Top Layer w0.3: v3(40.68,34.98) 40.685,34.975 41.987,34.975 42.533,34.429 42.533,33.309 U1.15
  Bottom Layer w0.3: P2.1 30.425,34.98 v3(40.68,34.98)
pads on no net: IC1.1 IC1.5 IC1.8 U1.9 U1.10 U1.11 U1.12 U1.13 U1.19 U1.22 U1.23 U1.24 U1.25 U1.26 U1.30 U1.31 U2.1 U2.6 U2.7 U3.4 U5.1 U5.3 U5.5 U5.7 U5.8 U5.9 U5.11 U5.12 U5.13 U5.15 U5.17 U5.19 VR2.1 VR2.MH1 VR2.MH2 Y2.1

## Polygon pours and split planes (outlines as drawn)
5V on Top Layer "5V_PowerPuddle3" (solid, remove dead copper, shelved, pour order 8): 62.22,46.71 62.49,46.44 65.13,46.44 65.13,45.75 62.73,45.75 62.28,45.3 62.28,44.7 62.85,44.13 64.98,44.13 65.22,43.89 65.22,43.08 65.1,42.96 62.97,42.96 61.89,44.04 61.23,44.04 61.17,44.04 61.11,44.04 59.34,44.04 59.22,44.16 59.22,46.62 59.31,46.71
GND on Top Layer "GND_PowerPuddle5" (solid, shelved, pour order 13): 57.6,31.62 57.57,31.62 54.75,31.62 54.6,31.47 54.6,29.85 54.87,29.58 57.81,29.58 57.9,29.67 57.9,31.376
GND on Top Layer "GND_PowerPuddle4" (solid, remove dead copper, shelved, pour order 12): 94.56,44.04 94.56,44.07 94.11,44.52 94.11,50.76 94.71,51.36 100.77,51.36 101.43,50.7 101.43,44.34 101.01,43.92 99.42,43.92 99.03,44.31 99.03,49.2 98.79,49.44 96.72,49.44 96.42,49.14 96.42,44.49 95.97,44.04
GND on Top Layer "GND_PowerPuddle3" (solid, remove dead copper, shelved, pour order 11): 77.505,28.092 77.102,27.72 76.845,27.72 74.175,27.72 73.725,28.17 73.725,29.88 73.995,30.15 77.205,30.15 77.505,29.85
GND on Top Layer "GND_PowerPuddle1" (solid, remove dead copper, shelved, pour order 10): 32.85,53.01 31.98,52.14 31.98,46.83 34.32,44.49 38.28,44.49 39,45.21 39,46.86 35.01,50.85 35.01,52.26 34.26,53.01
GND on Top Layer "GND_PowerPuddle2" (solid, shelved, pour order 9): 29.04,39.78 28.53,40.29 28.53,43.17 28.86,43.5 30.87,43.5 31.14,43.23 31.14,40.35 30.57,39.78
-12V on Top Layer "-12V_PowerPuddle1" (solid, remove dead copper, shelved, pour order 7): 56.76,47.52 56.97,47.31 57.57,47.31 57.75,47.49 57.75,49.32 59.7,51.27 62.1,51.27 62.46,51.51 62.46,52.53 62.04,52.95 59.49,52.95 57.84,51.3 56.85,51.3 56.76,51.21
5V on Top Layer "5V_PowerPuddle1" (solid, remove dead copper, shelved, pour order 6): 50.19,45.93 49.74,45.48 49.74,45.36 49.74,38.25 49.62,38.13 48.72,38.13 48.6,38.25 48.6,45.54 50.16,47.1 51.6,47.1 51.75,46.95 51.75,46.02 51.66,45.93
+12V on Top Layer "+12V_PowerPuddle1" (solid, remove dead copper, shelved, pour order 4): 52.38,47.4 51.63,48.15 50.28,48.15 47.46,50.97 41.43,50.97 41.13,50.67 41.13,48.6 40.35,47.82 38.79,47.82 37.98,48.63 37.98,52.62 38.7,53.34 40.8,53.34 42.06,52.08 49.29,52.08 51.75,49.62 53.79,49.62 53.85,49.56 53.85,47.49 53.76,47.4
5V on Top Layer "5V_PowerPuddle2" (solid, remove dead copper, shelved, pour order 2): 35.052,39.497 29.21,39.497 28.702,38.989 28.702,37.592 29.083,37.211 30.353,37.211 31.242,38.1 33.782,38.1 34.036,37.846 34.036,36.322 34.358,36 37.11,36 37.11,36.57 35.312,36.57 35.179,36.703 35.179,37.519 35.252,37.592 37.14,37.592 37.14,38.16 35.28,38.16 35.179,38.261 35.179,39.37
GND on GNDPlane1 "GND_PowerPlane1" (solid, shelved, pour order 0): 25.4,25.4 105.4,25.4 105.4,55.4 25.4,55.4
GND on GNDPlane2 "GND_PowerPlane2" (solid, shelved, pour order 1): 25.4,25.4 105.4,25.4 105.4,55.4 25.4,55.4

## Keep-outs
Keep-Out Layer:
  the board outline again, w0.254

## Silkscreen, mask and mechanical layers (free items; w line width, h text height)
Top Overlay:
  lines w0.254: 71.34,30.15 71.34,26.64 89.34,26.64 89.34,51.64 80.43,51.64
  text "encoder" at 79.52,52.52 h0.9
  text "offset" at 70.34,52.1 h0.9
  text "SIGNAL OUTPUT" at 89.88,51.42 h0.7
  text "amplitude" at 93.62,40.94 h0.9
Bottom Overlay:
  drawing of 20 lines, arcs and shapes, not listed

## Text inside footprints (layer, text, board x,y; h text height)
P2: Top Overlay "6" at 27.432,42.418 h0.3 r90; Top Overlay "5" at 30.226,42.418 h0.3 r90; Top Overlay "2" at 27.305,33.655 h0.3 r90; Top Overlay "1" at 30.099,33.782 h0.3 r90